# Allegro board PROIECT_pcb.brd
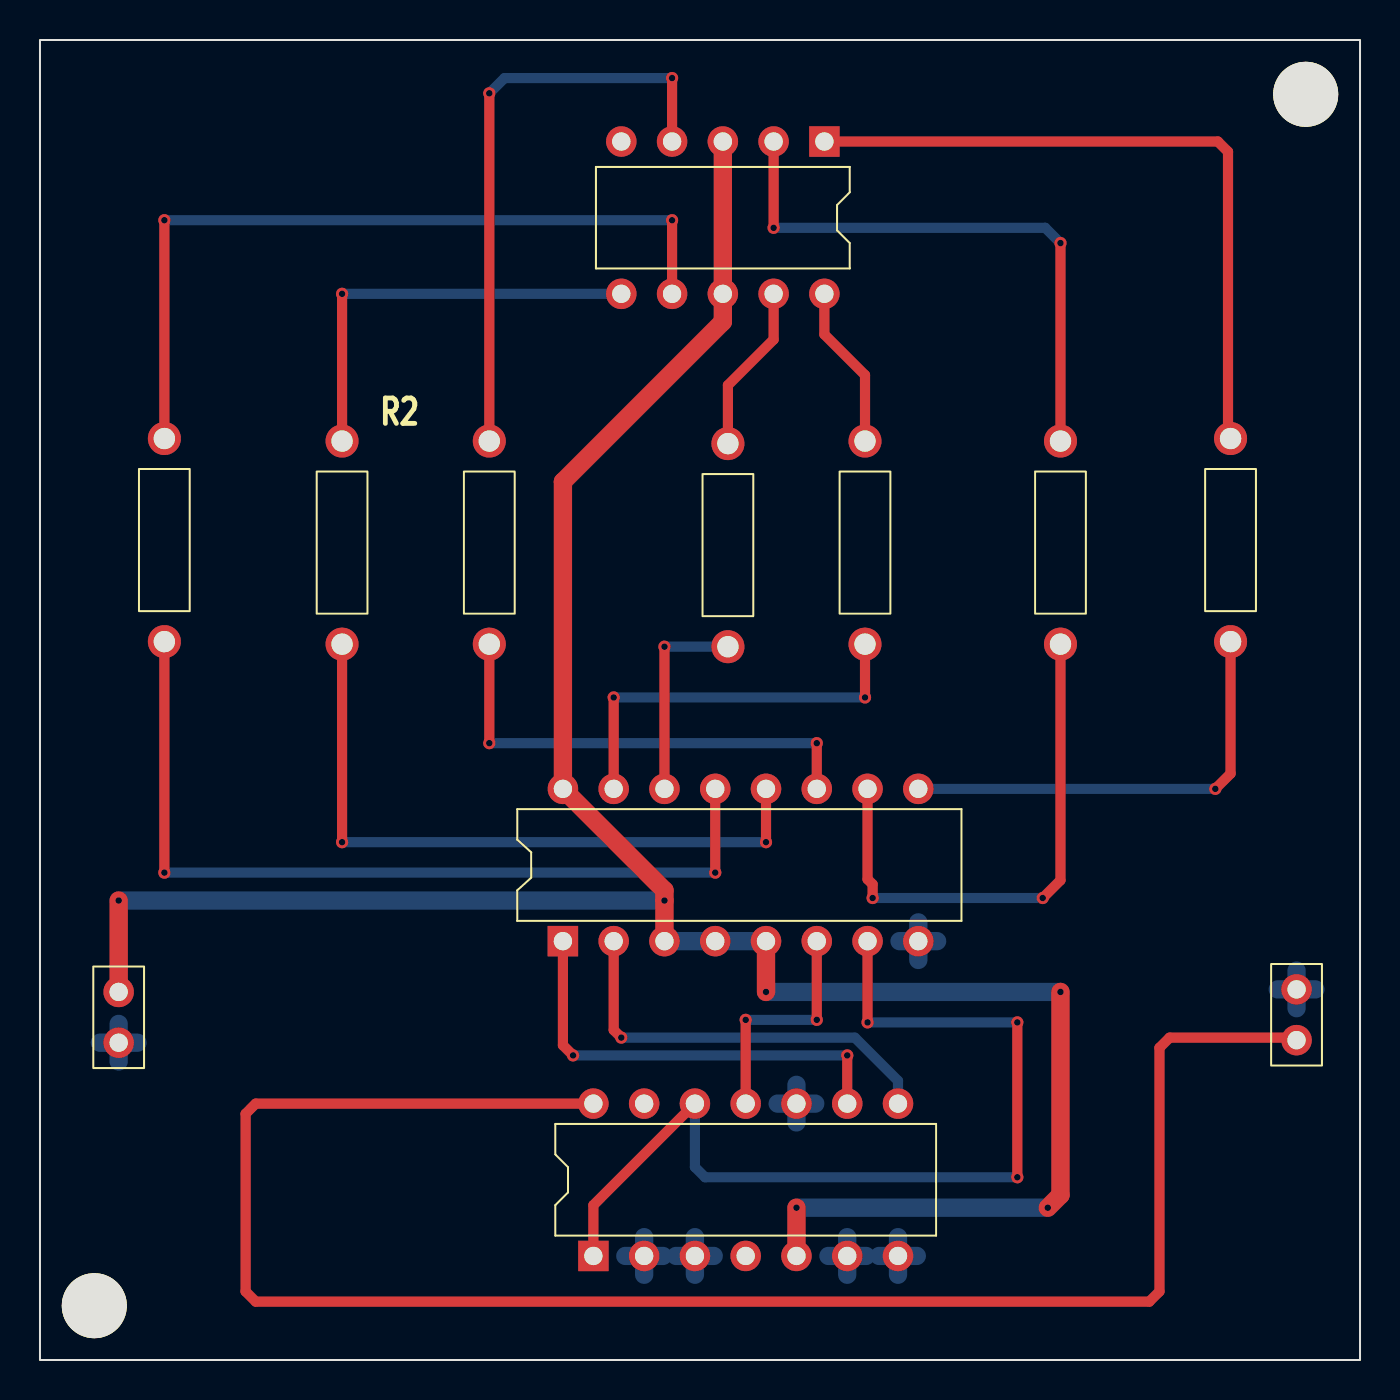
[diagram p0: board, top side]
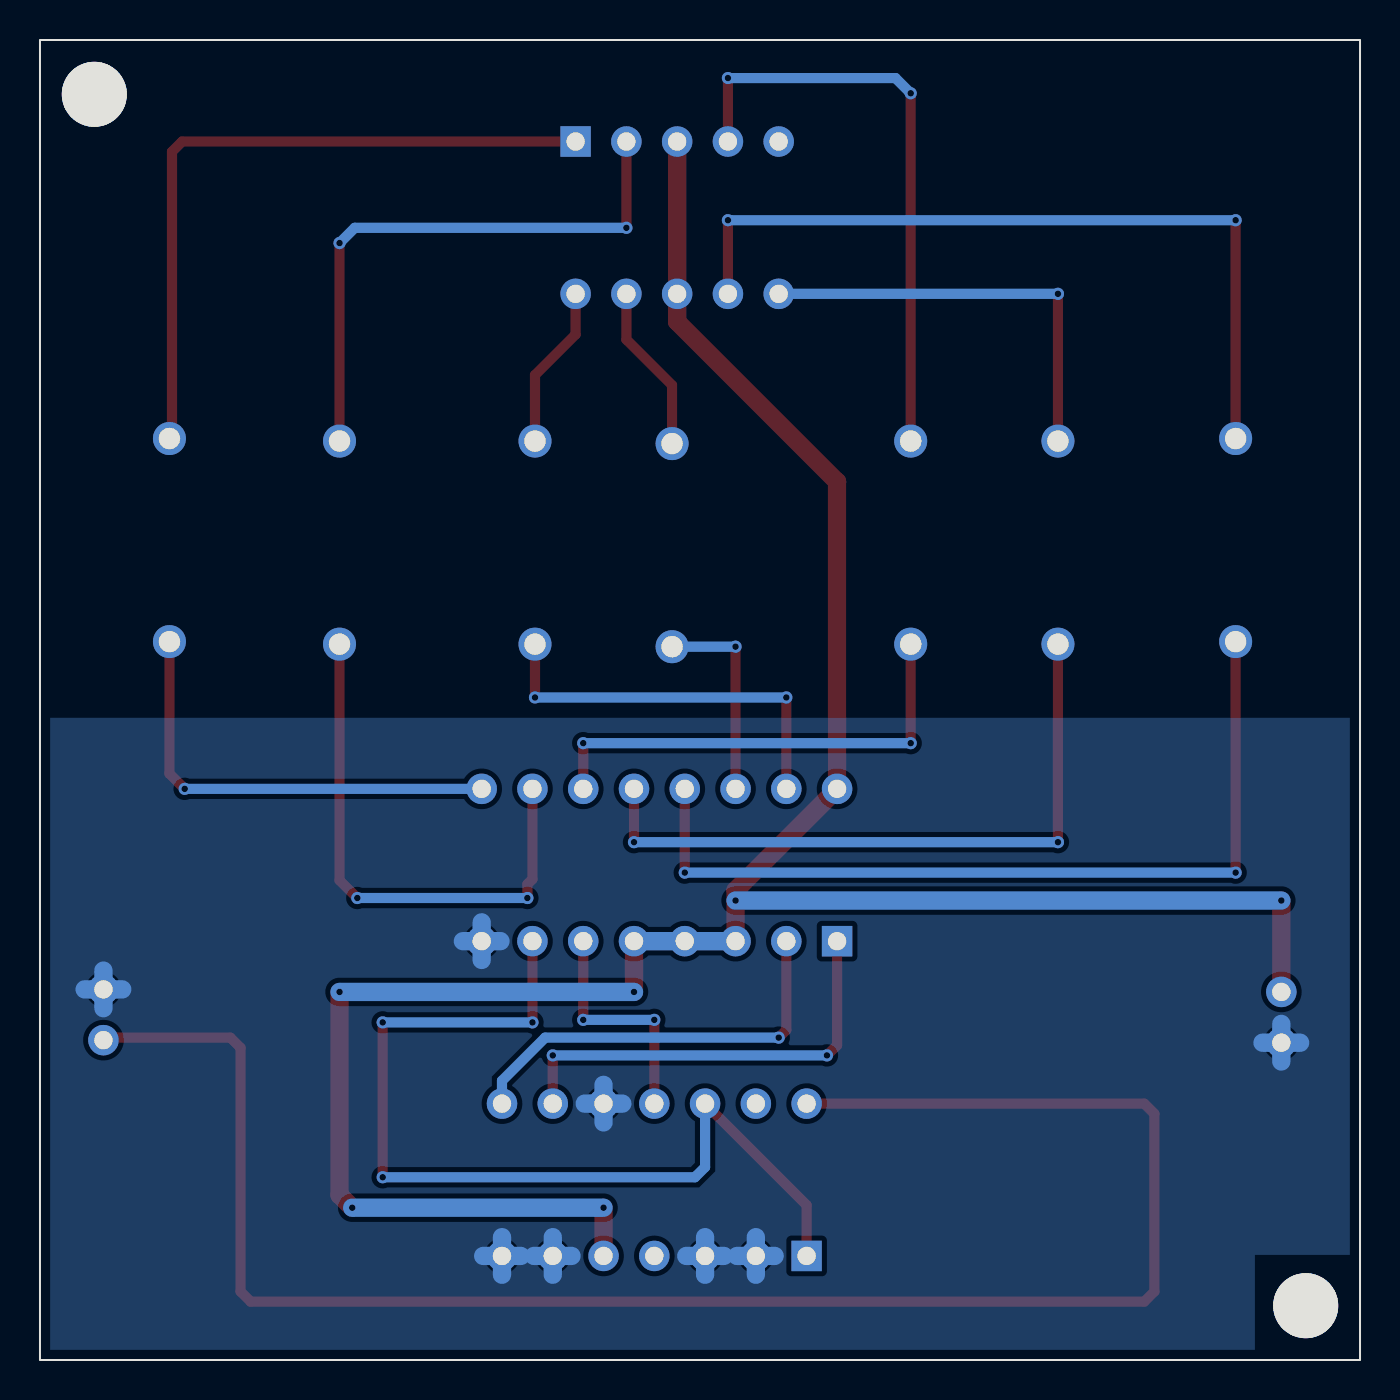
[diagram p1: board, bottom side, seen from below]

Outline 66.04 x 66.04 mm; copper layers: TOP, BOTTOM. Coordinates in mm from the lower left corner of the outline.
Outline path: rectangle 0,0 66.04,66.04

## Design rules (mm)
nets with their own width: min track width 0.508; nets CLOCK N06413 N06421 N06429 N06437 N06445 N06457 N06613 N06617 N06621 N06629 N06633 N06641 N06645 N06811 N06815 N06819 N06823 N08353
nets with their own width: min track width 0.914; nets +5V DC GND

## Placement (name value [footprint] x y rotation side)
D1  7_segment_display  [DIP10_3]  39.24 60.96 270 top
IC1  7446  [DIP16_3]  26.16 20.95 90 top
IC2  7490  [DIP14_3]  27.69 5.21 90 top
J1  CON2  [JUMPER2]  3.94 18.41 270 top
J2  CON2  [JUMPER2]  62.87 16 90 top
NOREF  -  [unnamed]  2.72 2.72 0 top
NOREF#2  -  [unnamed]  63.32 63.32 0 top
R1  220  [RES400]  6.22 46.1 180 top
R2  220  [RES400]  15.11 45.97 180 top
R3  220  [RES400]  22.48 45.97 180 top
R4  220  [RES400]  51.05 45.97 180 top
R5  220  [RES400]  59.56 46.1 180 top
R6  220  [RES400]  34.42 45.85 180 top
R7  220  [RES400]  41.27 45.97 180 top

## Library data of the parts
D1 = 7_segment_display_1: Tolerance: ***; User Part Number: ***
IC1 = 7446_6: Tolerance: ***; User Part Number: ***
IC2 = 7490_4: Tolerance: ***; User Part Number: ***
J1 J2 = CON2: User Part Number: ***
R1-R7 = R: Tolerance: ***; User Part Number: ***

## Footprints (pads in the part's own frame, mm; a bottom-side part is the same pattern mirrored in y, then rotated)
DIP10_3
  rect 1.524x1.524 hole 0.914: 1(0,0)
  round 1.524 hole 0.914: 2(0,-2.54) 3(0,-5.08) 4(0,-7.62) 5(0,-10.16) 6(7.62,-10.16) 7(7.62,-7.62) 8(7.62,-5.08) 9(7.62,-2.54) 10(7.62,0)
DIP14_3
  rect 1.524x1.524 hole 0.914: 1(0,0)
  round 1.524 hole 0.914: 2(0,-2.54) 3(0,-5.08) 4(0,-7.62) 5(0,-10.16) 6(0,-12.7) 7(0,-15.24) 8(7.62,-15.24) 9(7.62,-12.7) 10(7.62,-10.16) 11(7.62,-7.62) 12(7.62,-5.08) 13(7.62,-2.54) 14(7.62,0)
DIP16_3
  rect 1.524x1.524 hole 0.914: 1(0,0)
  round 1.524 hole 0.914: 2(0,-2.54) 3(0,-5.08) 4(0,-7.62) 5(0,-10.16) 6(0,-12.7) 7(0,-15.24) 8(0,-17.78) 9(7.62,-17.78) 10(7.62,-15.24) 11(7.62,-12.7) 12(7.62,-10.16) 13(7.62,-7.62) 14(7.62,-5.08) 15(7.62,-2.54) 16(7.62,0)
JUMPER2
  round 1.524 hole 0.914: 1(0,0) 2(2.54,0)
RES400
  round 1.651 hole 1.067: 1(0,0) 2(0,10.16)
unnamed
  round 3.251 hole 3.251 unplated: (0,0)

## Nets
+5V DC: D1.3 D1.8 IC1.3 IC1.4 IC1.5 IC1.16 IC2.5 J1.1
GND: IC1.8 IC2.2 IC2.3 IC2.6 IC2.7 IC2.10 J1.2 J2.2
CLOCK: IC2.14 J2.1
N06413: D1.7 R1.1
N06421: D1.10 R7.1
N06429: D1.6 R2.1
N06437: D1.9 R6.1
N06445: D1.4 R3.1
N06457: D1.1 R5.1
N06613: IC1.13 R1.2
N06617: IC1.12 R2.2
N06621: IC1.11 R3.2
N06629: IC1.10 R4.2
N06633: IC1.9 R5.2
N06641: IC1.14 R6.2
N06645: IC1.15 R7.2
N06811: IC1.6 IC2.11
N06815: IC1.2 IC2.8
N06819: IC1.1 IC2.9
N06823: IC1.7 IC2.1 IC2.12
N08353: D1.2 R4.1

Pads without a net: D1 5; IC2 4 13

## Via types
v1: diameter 0.61, hole 0.33, TOP to BOTTOM, 35 vias

## Routing (per net, layer and track width the routed paths; a pad name or vN(x,y) marks a point on that pad's centre or on a via; arc(x,y) is an arc through that point)
+5V DC: length 125.7
  TOP w0.914: v1(50.42,7.62) 51.05,8.26 v1(51.05,18.41) ; IC1.5 v1(36.32,18.41) ; v1(37.85,7.62) 37.85,5.21 ; D1.3 D1.8 34.16,51.94 26.16,43.94 IC1.16 31.24,23.5 v1(31.24,22.99) IC1.3 ; J1.1 v1(3.94,22.99)
  BOTTOM w0.914: IC1.3 IC1.4 IC1.5 ; v1(3.94,22.99) v1(31.24,22.99) ; v1(36.32,18.41) v1(51.05,18.41) ; v1(50.42,7.62) v1(37.85,7.62)
GND: length 30.1
  BOTTOM w0.914: 29.29,5.21 IC2.2 ; IC2.2 31.17,5.21 ; IC2.2 30.23,4.27 ; IC2.2 30.23,6.15 ; 39.45,5.21 40.39,5.21 ; 40.39,5.21 40.39,4.27 ; 40.39,5.21 41.33,5.21 ; 40.39,5.21 40.39,6.15 ; 42.93,5.21 43.87,5.21 ; 42.93,5.21 42.93,6.15 ; 42.93,5.21 41.99,5.21 ; 42.93,5.21 42.93,4.27 ; J1.2 4.88,15.88 ; J1.2 3,15.88 ; J1.2 3.94,14.93 ; J1.2 3.94,16.82 ; 31.83,5.21 IC2.3 ; IC2.3 32.77,4.27 ; IC2.3 32.77,6.15 ; IC2.3 33.71,5.21 ; 62.87,17.6 J2.2 ; J2.2 62.87,19.48 ; J2.2 63.81,18.54 ; J2.2 61.92,18.54 ; IC2.10 38.79,12.83 ; IC2.10 37.85,13.77 ; IC2.10 37.85,11.89 ; IC2.10 36.91,12.83 ; 43.94,20.01 IC1.8 ; IC1.8 43.94,21.9 ; IC1.8 44.88,20.95 ; IC1.8 43,20.95
CLOCK: length 92
  TOP w0.508: J2.1 62.74,16.13 56.52,16.13 56.01,15.62 56.01,3.43 55.5,2.92 10.79,2.92 10.29,3.43 10.29,12.32 10.79,12.83 IC2.14
N06413: length 40
  TOP w0.508: D1.7 v1(31.62,57.02) ; v1(6.22,57.02) R1.1
  BOTTOM w0.508: v1(31.62,57.02) v1(6.22,57.02)
N06421: length 8.2
  TOP w0.508: D1.10 39.24,51.31 41.27,49.28 R7.1
N06429: length 21.3
  TOP w0.508: v1(15.11,53.34) R2.1
  BOTTOM w0.508: D1.6 v1(15.11,53.34)
N06437: length 8.4
  TOP w0.508: R6.1 34.42,48.77 36.7,51.05 D1.9
N06445: length 30
  TOP w0.508: D1.4 v1(31.62,64.14) ; v1(22.48,63.37) R3.1
  BOTTOM w0.508: v1(22.48,63.37) 23.24,64.14 v1(31.62,64.14)
N06457: length 34.8
  TOP w0.508: D1.1 58.93,60.96 59.44,60.45 59.44,46.23 R5.1
N06613: length 43.3
  TOP w0.508: v1(33.78,24.38) IC1.13 ; 6.22,35.94 v1(6.22,24.38)
  BOTTOM w0.508: v1(6.22,24.38) v1(33.78,24.38)
N06617: length 33.8
  TOP w0.508: R2.2 v1(15.11,25.91) ; v1(36.32,25.91) IC1.12
  BOTTOM w0.508: v1(15.11,25.91) v1(36.32,25.91)
N06621: length 23.6
  TOP w0.508: v1(38.86,30.86) IC1.11 ; R3.2 v1(22.48,30.86)
  BOTTOM w0.508: v1(22.48,30.86) v1(38.86,30.86)
N06629: length 27.1
  TOP w0.508: IC1.10 41.4,24.05 41.66,23.8 v1(41.66,23.11) ; v1(50.16,23.11) 51.05,24 R4.2
  BOTTOM w0.508: v1(50.16,23.11) v1(41.66,23.11)
N06633: length 22.5
  TOP w0.508: R5.2 59.56,29.34 v1(58.8,28.57)
  BOTTOM w0.508: v1(58.8,28.57) IC1.9
N06641: length 10.3
  TOP w0.508: v1(31.24,35.69) IC1.14
  BOTTOM w0.508: R6.2 v1(31.24,35.69)
N06645: length 19.8
  TOP w0.508: R7.2 v1(41.27,33.15) ; v1(28.7,33.15) IC1.15
  BOTTOM w0.508: v1(41.27,33.15) v1(28.7,33.15)
N06811: length 11.7
  TOP w0.508: v1(35.31,17.02) IC2.11 ; IC1.6 v1(38.86,17.02)
  BOTTOM w0.508: v1(38.86,17.02) v1(35.31,17.02)
N06815: length 21
  TOP w0.508: v1(29.08,16.13) 28.7,16.51 v1(28.7,20.83) v1(28.7,20.95)
  BOTTOM w0.508: v1(28.7,20.95) v1(28.7,20.83) ; v1(29.08,16.13) 40.77,16.13 42.93,13.97 42.93,12.83
N06819: length 22.1
  TOP w0.508: v1(40.39,15.24) IC2.9 ; IC1.1 26.16,15.75 v1(26.67,15.24)
  BOTTOM w0.508: v1(26.67,15.24) v1(40.39,15.24)
N06823: length 48.5
  TOP w0.508: IC1.7 v1(41.4,16.89) ; IC2.12 27.69,7.75 IC2.1 ; v1(48.9,16.89) v1(48.9,9.14)
  BOTTOM w0.508: v1(41.4,16.89) v1(48.9,16.89) ; IC2.12 32.77,9.65 33.27,9.14 v1(48.9,9.14)
N08353: length 28.9
  TOP w0.508: v1(51.05,55.88) R4.1 ; D1.2 v1(36.7,56.64)
  BOTTOM w0.508: v1(51.05,55.88) 50.29,56.64 v1(36.7,56.64)

## Copper pours and planes (outline as drawn; the poured copper is in the pictures)
GND on BOTTOM: 0.51,0.51 0.51,32.13 65.53,32.13 65.53,0.51

## Text on the board
Ref Des/Silkscreen Top: R2
XSECTION_CHART: *  SURFACE | L1 TOP CONDUCTOR | *  DIELECTRIC | L2 BOTTOM CONDUCTOR | DESIGN CROSS SECTION CHART | ___________________________ | TOTAL THICKNESS 10.4 MIL | 1-2
DEVICE_TYPE_TOP: FIGURE | FINISHED_SIZE | 13.0 | 36.0 | 42.0 | 128.0 | DRILL CHART: TOP to BOTTOM | ALL UNITS ARE IN MILS | PLATED | NON-PLATED | QTY | 45 | 44 | 14 | 2
